# Altium PCB ECEN4730_AUA1_2021-10-18.PcbDoc
Units mm, origin at the board's own origin, x right, y up, seen from the top; angles counter-clockwise.
Board outline 68.58 x 53.34 mm, 2 copper layers (Top Layer, Bottom Layer), stack 1.569 mm thick; 40 components, 37 nets, 175 pads, 73 vias.
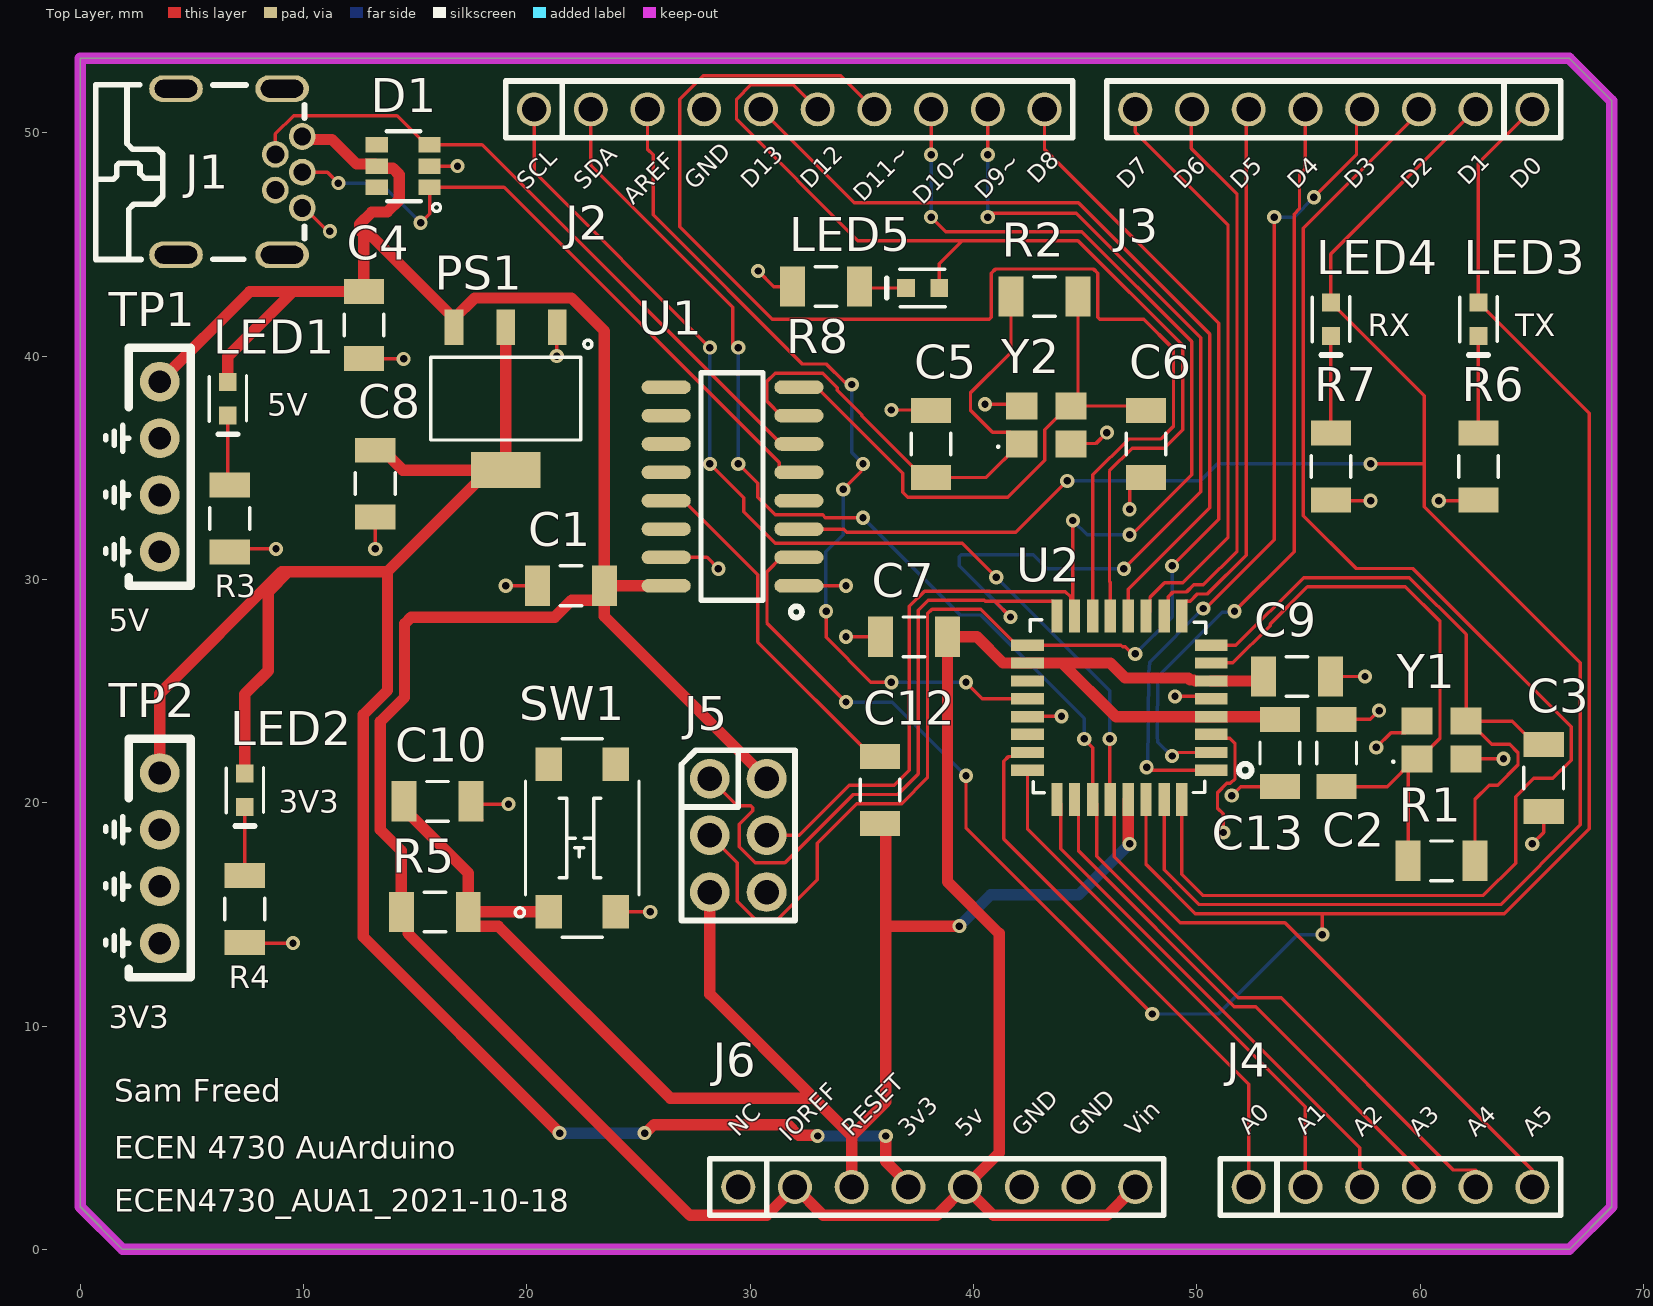
[diagram p0: Top Layer view]
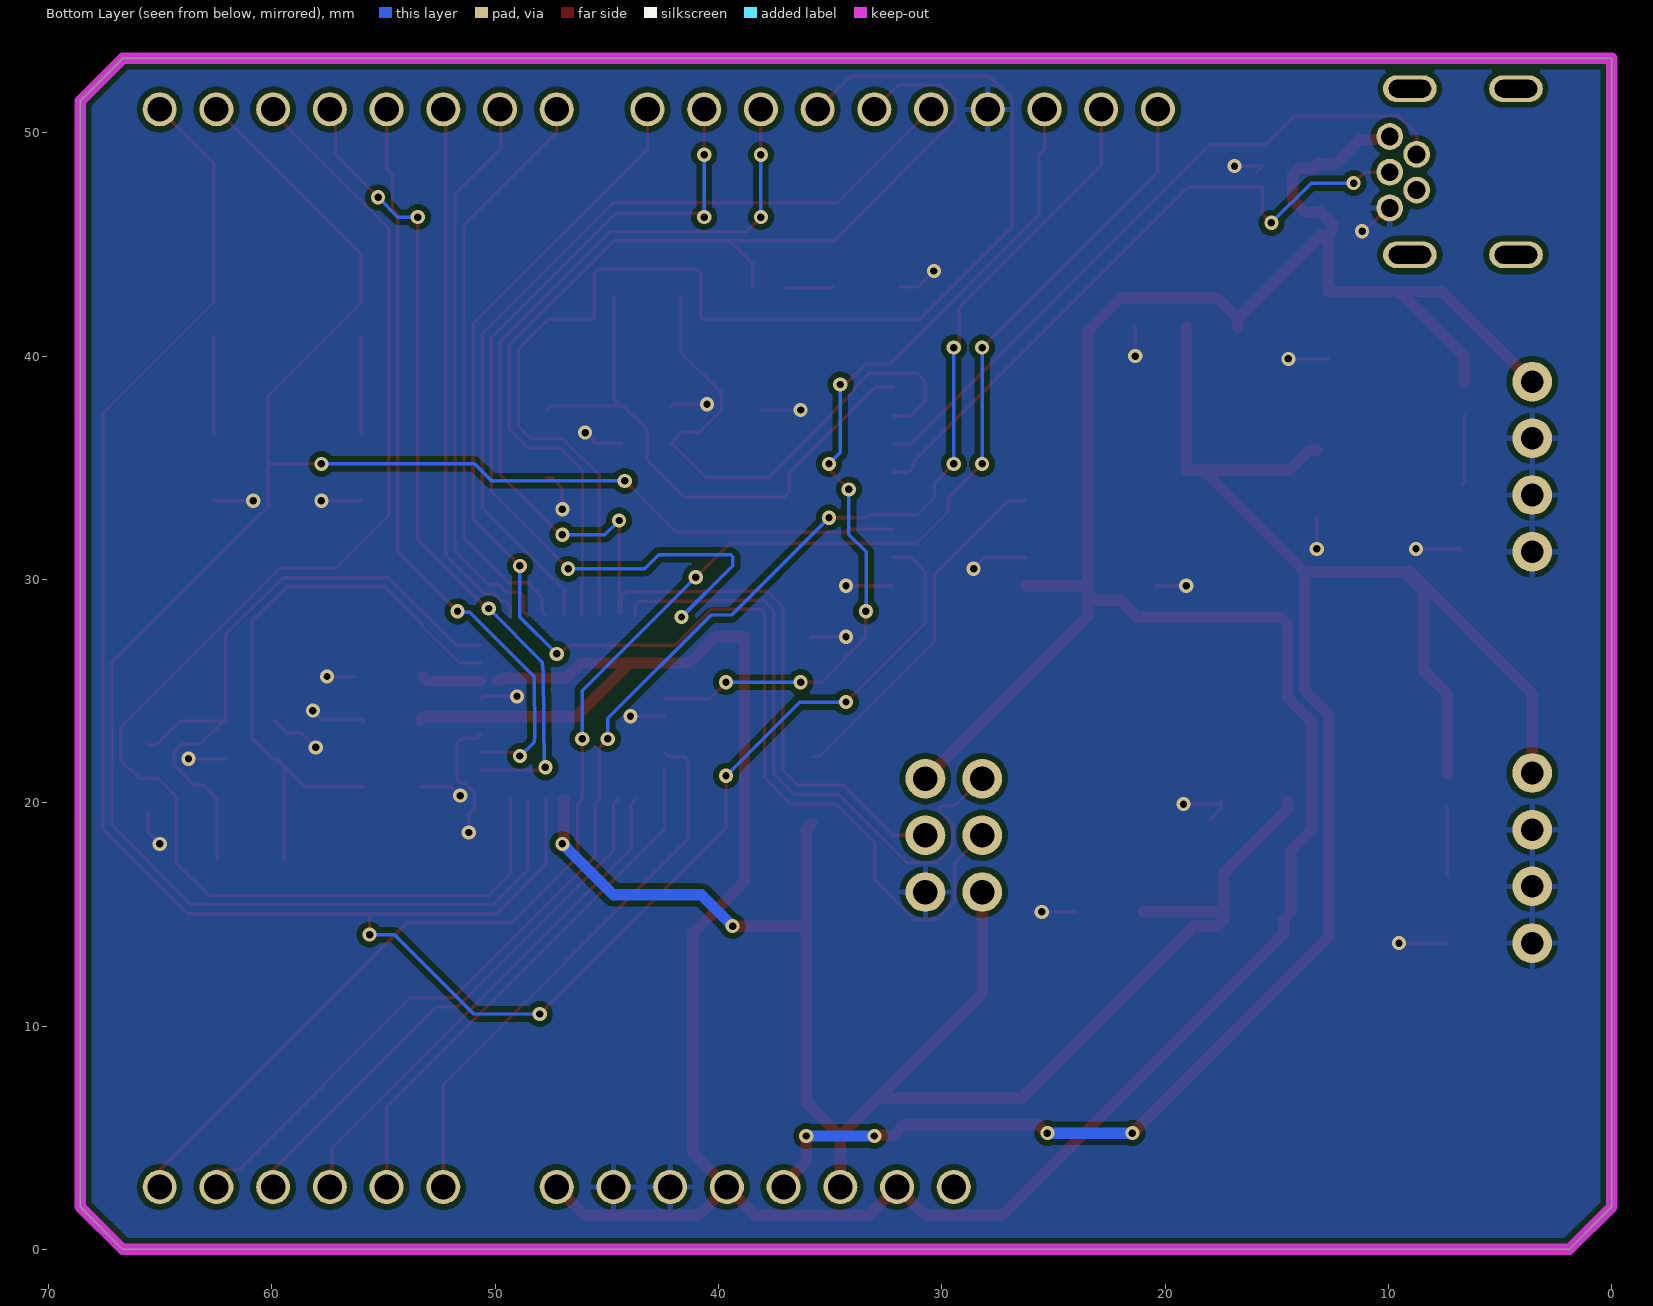
[diagram p1: Bottom Layer view, seen from below]
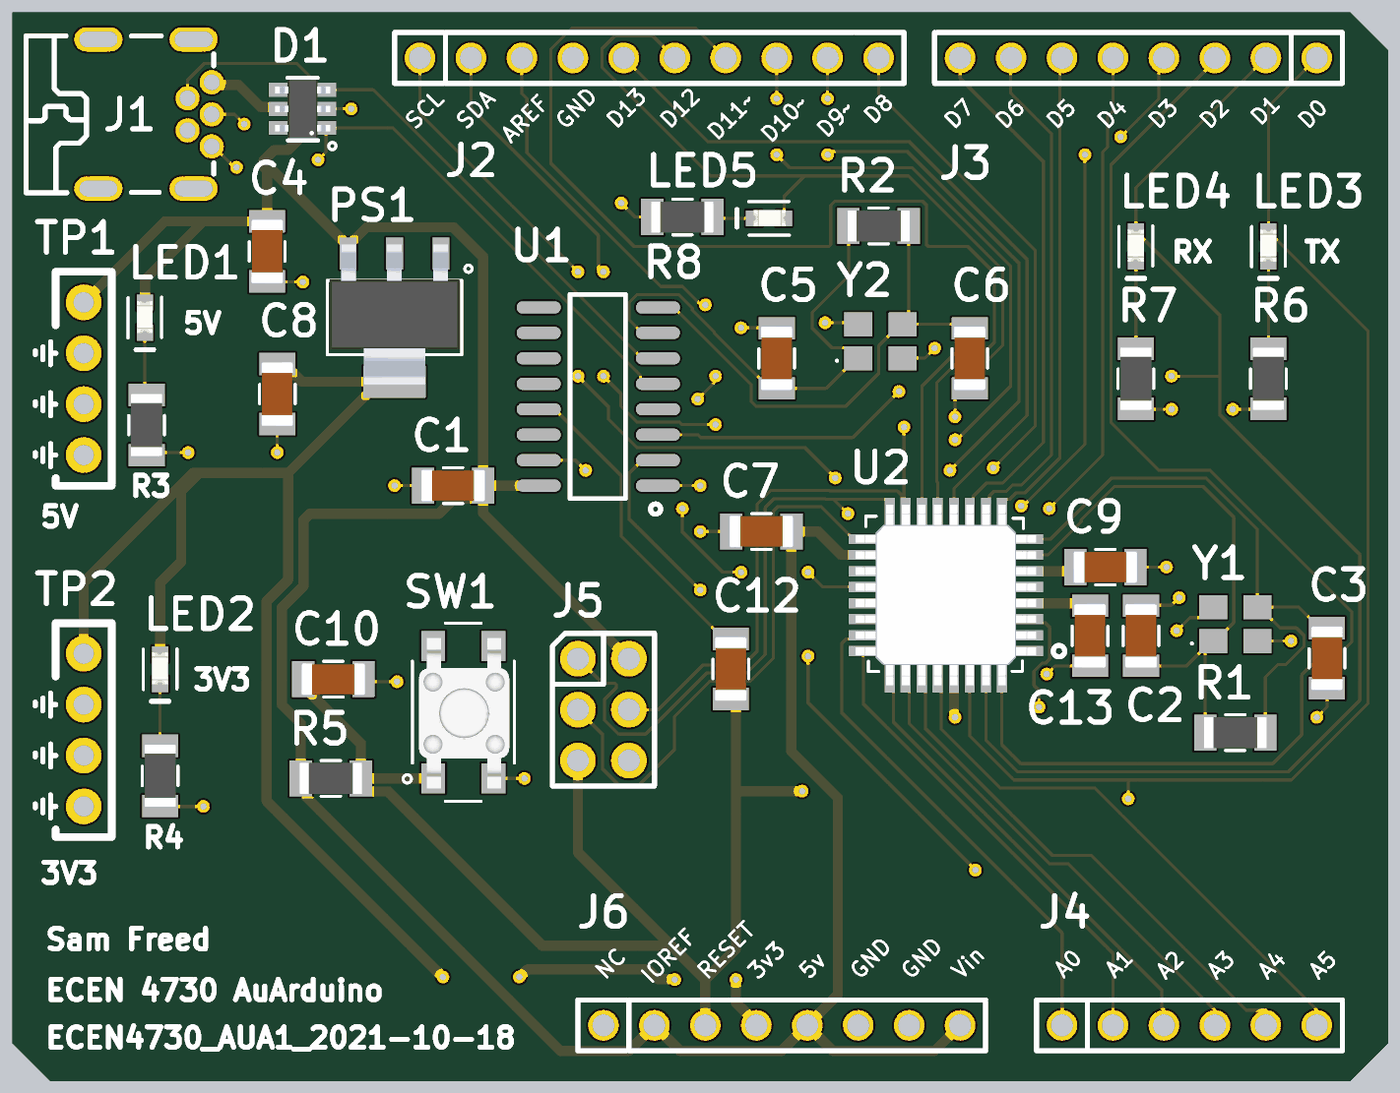
[diagram p2: 3D render of the assembled board from above, using the file's embedded part models]

## Layer stack, top to bottom
Top Solder: solder mask 0.0254, SM-001, Dk 4
Top Layer: signal copper 0.035
Dielectric 1: core 1.4986, Core-043, Dk 4.3
Bottom Layer: signal copper 0.035
Bottom Solder: solder mask 0.0254, SM-001, Dk 4

## Board outline
66.675,53.34 68.58,51.435 68.58,1.905 66.675,0 1.905,0 0,1.905 0,53.34

## Design rules (kind name [scope] priority, off if disabled: settings)
BoardOutlineClearance [All] p1: gap=0.254 ignorepadtopadclearanceinfootprint=FALSE except(0: Arc-SplitContinuation Track-SplitContinuation SMDPad-SplitContinuation THPad-SplitContinuation Via-SplitContinuation Fill-SplitContinuation Poly-SplitContinuation Region-SplitContinuation Text-SplitContinuation)
Clearance [All] p1: gap=0.254 ignorepadtopadclearanceinfootprint=FALSE except(0: Arc-Hole Track-Hole SMDPad-Hole THPad-Hole Via-Hole Fill-Hole Poly-Hole Region-Hole Text-Hole)
PlaneClearance [All] p1: clearance=0.254
PlaneConnect [All] p1: planeconnectstyle=Direct reliefexpansion=0.508 reliefentries=4 reliefconductorwidth=0.254 reliefairgap=0.254
PolygonConnect [All] p1: thpad.connectstyle=Relief thpad.reliefconductorwidth=0.254 thpad.reliefentries=4 thpad.polygonreliefangle="90 Angle" thpad.airgapwidth=0.254 smdpad.connectstyle=Direct smdpad.reliefconductorwidth=0.254 smdpad.reliefentries=4 smdpad.polygonreliefangle="90 Angle" smdpad.airgapwidth=0.254 via.connectstyle=Direct via.reliefconductorwidth=0.254 via.reliefentries=4 via.polygonreliefangle="90 Angle" via.airgapwidth=0.254
RoutingVias [All] p1: holewidth=0.33 width=0.635 viastyle="Through Hole" minholewidth=0.33 minwidth=0.635 maxholewidth=1.524 maxwidth=2.032
SolderMaskExpansion [All] p1: expansion=0.102 istentingtop=FALSE
UnRoutedNet [All] p1: checkbadconnections=TRUE
Width "Schematic Width Constraint_2" [InNet('RST')] p1: maxlimit=2.54 minlimit=0.254 preferedwidth=0.508 minimp=50.000000 maximp=50.000000 favimp=50.000000
Width "Schematic Width Constraint_1" [InNet('VCC')] p2: maxlimit=2.54 minlimit=0.254 preferedwidth=0.508 minimp=50.000000 maximp=50.000000 favimp=50.000000
Width "Schematic Width Constraint" [InNet('+5')] p3: maxlimit=2.54 minlimit=0.254 preferedwidth=0.508 minimp=50.000000 maximp=50.000000 favimp=50.000000
Width [All] p4: maxlimit=2.54 minlimit=0.152 preferedwidth=0.152 minimp=50.000000 maximp=50.000000 favimp=50.000000
27 further rules are at their usual default settings.

## Components (designator, comment, footprint, x,y, rotation, side; value= is the part's Value field where it differs from the comment)
C1 "22uF" 1206_Passive_Capacitor 21.971,29.718 r0 top
C2 "22pF" 1206_Passive_Capacitor 56.261,22.225 r270 top
C3 "22pF" 1206_Passive_Capacitor 65.532,21.107 r90 top
C4 "22uF" 1206_Passive_Capacitor 12.7,41.402 r90 top
C5 "22pF" 1206_Passive_Capacitor 38.1,36.068 r270 top
C6 "22pF" 1206_Passive_Capacitor 47.725,36.068 r90 top
C7 "22uF" 1206_Passive_Capacitor 37.338,27.432 r0 top
C8 "22uF" 1206_Passive_Capacitor 13.208,34.29 r90 top
C9 "22uF" 1206_Passive_Capacitor 54.483,25.654 r180 top
C10 "1uF" 1206_Passive_Capacitor 16.002,20.066 r0 top
C12 "22uF" 1206_Passive_Capacitor 35.814,20.574 r270 top
C13 "22uF" 1206_Passive_Capacitor 53.721,22.225 r90 top
D1 "SRV05-4-P-T7" TVS 14.478,48.514 r180 top value="TVS DIODE 5.5V 6TSOP"
J1 "USB Mini" USB_MINI_B 7.112,48.26 r270 top value="USB mini B"
J2 "PPTC101LFBN-RC" 10_PIN_ARDUINO_100MIL 20.32,51.054 r0 top locked value=Female
J3 "PPTC081LFBN-RC" 8_PIN_ARDUINO_100MIL 65.024,51.054 r180 top locked value=Female
J4 "PPTC061LFBN-RC" 6_PIN_ARDUINO_100mil 52.324,2.794 r0 top locked value=Female
J5 "NRPN032PAEN-RC" ICSP 28.194,21.082 r0 top
J6 "PPTC081LFBN-RC" 8_PIN_ARDUINO_100MIL 29.464,2.794 r0 top locked value=Female
LED1 "KT-0603R" LED_0603 6.604,38.1 r270 top value=Yellow
LED2 "KT-0603R" LED_0603 7.366,20.562 r270 top value=Yellow
LED3 "KT-0603R" LED_0603 62.611,41.656 r270 top value=Yellow
LED4 "KT-0603R" LED_0603 56.007,41.656 r270 top value=Yellow
LED5 "KT-0603R" LED_0603 37.719,43.053 r180 top value=Yellow
PS1 "AMS1117-3.3" LDO 19.05,38.1 r180 top value="IC REG LINEAR 3.3V 800MA SOT223"
R1 "10k" 1206_Passive_Resitor 60.96,17.399 r0 top value=10KOhm
R2 "10k" 1206_Passive_Resitor 43.18,42.672 r0 top value=10KOhm
R3 "1k" 1206_Passive_Resitor 6.693,32.738 r90 top value="1K Ohm"
R4 "1k" 1206_Passive_Resitor 7.366,15.24 r90 top value="1K Ohm"
R5 "1k" 1206_Passive_Resitor 15.875,15.113 r180 top value="1K Ohm"
R6 "1k" 1206_Passive_Resitor 62.611,35.052 r90 top value="1K Ohm"
R7 "1k" 1206_Passive_Resitor 56.007,35.052 r90 top value="1K Ohm"
R8 "1k" 1206_Passive_Resitor 33.402,43.118 r0 top value="1K Ohm"
SW1 "TL3305AF160QG" Switch_JLC 22.479,18.417 r90 top
TP1 "10x Probe TP" TP10x_Probe 3.556,35.052 r270 top
TP2 "10x Probe TP" TP10x_Probe 3.556,17.526 r270 top
U1 "CH340G" "USB to serial" 29.21,34.163 r90 top value="USB to Serial"
U2 "ATMEGA328P-ANR" ATMega328P 46.482,24.257 r0 top value="IC MCU 8BIT 32KB FLASH 32TQFP"
Y1 "X322516MLB4SI" "Crystal resonator" 60.96,22.86 r0 top value=16MHz
Y2 "X322512MSB4SI" "Crystal resonator" 43.264,36.968 r0 top value=12MHz

## Footprints (in the part's own frame and the unit in brackets; to place one, negate y for a bottom-side part, rotate by r counter-clockwise, add the part's x,y. Pads: shape width x height; smd on the part's side, far side on the other; paste and mask are expansions set on the pad)
6_PIN_ARDUINO_100mil [mil]
  round 60 hole 43.31: 1(0,0) 2(100,0) 3(200,0) 4(300,0) 5(400,0) 6(500,0)
  silkscreen extent -50,-50 550,50
8_PIN_ARDUINO_100MIL [mil]
  round 60 hole 43.31: 1(0,0) 2(100,0) 3(200,0) 4(300,0) 5(400,0) 6(500,0) 7(600,0) 8(700,0)
  silkscreen extent -50,-50 750,50
10_PIN_ARDUINO_100MIL [mil]
  round 60 hole 43.31: 1(0,0) 2(100,0) 3(200,0) 4(300,0) 5(400,0) 6(500,0) 7(600,0) 8(700,0) 9(800,0) 10(900,0)
  silkscreen extent -50,-50 950,50
1206_Passive_Capacitor [mil]
  rect 44x71 smd: 1(-59,0) 2(59,0)
  silkscreen extent -19,-35 19,35, body extent -63,-31 63,32, height 50
1206_Passive_Resitor [mil]
  rect 44x71 smd: 1(-59,0) 2(59,0)
  silkscreen extent -19,-35 19,35, body extent -61,-31 61,31, height 26
ATMega328P [mil]
  rect 58x20 smd mask+1: 1(163.93,-110) 2(163.93,-79) 3(163.93,-47) 4(163.93,-16) 5(163.93,16) 6(163.93,47) 7(163.93,79) 8(163.93,110) 17(-160.07,110) 18(-160.07,79) 19(-160.07,47) 20(-160.07,16) 21(-160.07,-16) 22(-160.07,-47) 23(-160.07,-79) 24(-160.07,-110)
  rect 20x58 smd mask+1: 9(111.93,162) 10(80.93,162) 11(48.93,162) 12(17.93,162) 13(-14.07,162) 14(-45.07,162) 15(-77.07,162) 16(-108.07,162) 25(-108.07,-162) 26(-77.07,-162) 27(-45.07,-162) 28(-14.07,-162) 29(17.93,-162) 30(48.93,-162) 31(80.93,-162) 32(111.93,-162)
  silkscreen extent -155,-150 235,155, body extent -175,-177 179,177, height 46
"Crystal resonator" [mil]
  rect 55.11x47.24 smd: 1(-43.3,-35.43) 2(43.31,-35.43) 3(43.32,31.5) 4(-43.3,31.5)
  silkscreen extent -87,-42 -83,-38, body extent -65,-47 65,47, height 31
ICSP [mil]
  round 70 hole 43.31: 1(0,0) 2(0,-100) 3(0,-200) 4(100,0) 5(100,-100) 6(100,-200)
  silkscreen extent -50,-250 150,50
LDO [mil]
  rect 33x63 smd: 1(-91,-126) 2(0,-126) 3(91,-126)
  rect 122x63 smd: 4(0,126)
  silkscreen extent -152,-103 132,73, body extent -128,-144 128,132, height 73
LED_0603 [mm]
  rect 0.8x0.8 smd: 1(-0.75,0) 2(0.75,0)
  silkscreen extent -1.02,-0.84 1.6,0.84, body extent -0.84,-0.41 0.76,0.39, height 0.55
Switch_JLC [mm]
  rect 1.5x1.2 smd: 1(-3.3,1.5) 2(3.3,1.5) 3(-3.3,-1.5) 4(3.3,-1.5)
  silkscreen extent -4.44,-2.54 4.45,3, body extent -3.8,-2.29 3.7,2.21, height 3.7
TP10x_Probe [mil] "Small Probs footprint"
  round 70 hole 40: 1(-150,0) 2(-50,0) 2(50,0) 2(150,0)
  silkscreen extent -210,-95 210,55
TVS [mm]
  rect 1x0.7 smd mask+0.025: 1(-1.162,0.95) 2(-1.162,0) 3(-1.162,-0.95) 4(1.2,-0.95) 5(1.2,0) 6(1.2,0.95)
  silkscreen extent -1.65,-1.55 0.76,2.03, body extent -1.37,-1.44 1.38,1.46, height 1.1
"USB to serial" [mil]
  oval 24x86.61 smd: 1(-175,-117) 2(-125,-117) 3(-75,-117) 4(-25,-117) 5(25,-117) 6(75,-117) 7(125,-117) 8(175,-117) 9(175,117) 10(125,117) 11(75,117) 12(25,117) 13(-25,117) 14(-75,117) 15(-125,117) 16(-175,117)
  silkscreen extent -231,-122 201,56
USB_MINI_B [mm]
  round 1.2 hole 0.8: 1(-1.58,2.826) 2(-0.78,1.622) 3(0.02,2.826) 4(0.82,1.622) 5(1.62,2.826)
  oval 1.2x2.4 hole 0.8 slot 1.9 at 90 deg: 6(-3.72,1.924) 7(3.72,1.924) 8(-3.72,-2.826) 9(3.72,-2.826)
  silkscreen extent -3.89,-6.42 3.93,2.93

## Part data
C1 C4 C7 C8 C9 C12 C13: library part C_22uF_1206, "22uF ±10% 25V X5R 1206 Multilayer Ceramic Capacitors MLCC - SMD/SMT RoHS", LCSC Part#=C12891, MFR Part #=CL31A226KAHNNNE, Datasheet=https://datasheet.lcsc.com/lcsc/1811031514_Samsung-Electro-Mechanics-CL31A226KAHNNNE_C12891.pdf, Type=Extended
C2 C3 C5 C6: library part C_22pF_1206, "22pF ±5% 1kV C0G 1206 Multilayer Ceramic Capacitors MLCC - SMD/SMT RoHS", LCSC Part#=C313096, MFR Part #=1206CG220J102NT, Datasheet=https://datasheet.lcsc.com/lcsc/1810311150_FH-Guangdong-Fenghua-Advanced-Tech-1206CG220J102NT_C313096.pdf, Type=Extended
C10: library part C_1uF_1206, "MULTILAYER CERAMIC CAPACITORS MLCC - SMD/SMT 1UF 50V 1206 ROHS", LCSC Part#=C1848, MFR Part #=CL31B105KBHNNNE, Digikey Link=https://www.digikey.com/product-detail/en/C1206C105M4RACTU/399-8150-1-ND/3471873/?itemSeq=304982366, Digikey Part=399-8150-1-ND, Type=Basic
D1: library part D_TVS_Diode, "TVS SOT-23-6 ROHS", LCSC Part#=C85364, Datasheet=https://datasheet.lcsc.com/szlcsc/ProTek-Devices-SRV05-4-P-T7_C85364.pdf, MFR Part #=SRV05-4-P-T7, Type=Basic
J1: library part J_USB_B_Mini, "Through Hole USB Connectors RoHS", LCSC Part#=C46398, MFR Part #=920-462A2021D10102, Datasheet=https://datasheet.lcsc.com/szlcsc/2103081233_Jing-Extension-of-the-Electronic-Co-920-462A2021D10102_C46398.pdf, Type=Extended
J2: library part JF_10_PIN_FEMALE_ARDUINO, "10 Position Header Connector 0.100\" (2.54mm) Through Hole Tin", LCSC Part#=C225507, Digikey Link=https://www.digikey.com/product-detail/en/PPTC101LFBN-RC/S7008-ND/810149/?itemSeq=304982352, Digikey Part=S7008-ND, Type=Extended
J3 J6: library part JF_8_PIN_FEMALE_ARDUINO, "8 Position Header Connector 0.100\" (2.54mm) Through Hole Tin", LCSC Part#=C27438, Digikey Link=https://www.digikey.com/product-detail/en/PPTC081LFBN-RC/S7006-ND/810147/?itemSeq=304982354, Digikey Part=S7006-ND, Type=Extended
J4: library part JF_6_PIN_FEMALE_ARDUINO, "6 Position Header Connector 0.100\" (2.54mm) Through Hole Tin", LCSC Part#=C40877, Digikey Link=https://www.digikey.com/product-detail/en/PPTC061LFBN-RC/S7004-ND/810145/?itemSeq=304982353, Digikey Part=S7004-ND, Type=Extended
J5: library part J_ICSP, "Connector Header Through Hole 6 position 0.079\" (2.00mm)", LCSC Part#=C124384, Digikey Link=https://www.digikey.com/product-detail/en/NRPN032PAEN-RC/S5801-03-ND/804955/?itemSeq=304982355, Digikey Part=S5801-03-ND, Type=Extended
LED1 LED2 LED3 LED4 LED5: library part LED_YELLOW_0603, "LIGHT EMITTING DIODES (LED) YELLOW 585.5~591.5NM 90~180MCD@20MA TOP VIEW 0603 ROHS", LCSC Part#=C72038, MFR Part #=19-213/Y2C-CQ2R2L/3T(CY), Datasheet=https://datasheet.lcsc.com/szlcsc/Everlight-Elec-19-217-BHC-ZL1M2RY-3T_C72041.pdf, Type=Basic
PS1: library part PS_AMS_LDO_3v3, "LOW DROPOUT REGULATORS(LDO) POSITIVE FIXED 1.3V @ 800MA 15V 3.3V 1A SOT-223 ROHS", LCSC Part#=C6186, MFR Part #=AMS1117-3.3, Type=Basic
R1 R2: library part R_10KOhm_1206, "10 kOhms ±5% 0.25W, 1/4W Chip Resistor 1206 (3216 Metric) Automotive AEC-Q200 Thick Film", LCSC Part#=C17902, Digikey Link=https://www.digikey.com/product-detail/en/RMCF1206JT300R/RMCF1206JT300RCT-ND/1942776/?itemSeq=304982374, Digikey Part=RMCF1206JT300RCT-ND, Type=Basic
R3 R4 R5 R6 R7 R8: library part R_1K_1206, "CHIP RESISTOR - SURFACE MOUNT 1KOHMS ±1% 1/4W 1206 ROHS", LCSC Part#=C4410, MFR Part #=1206W4F1001T5, Digikey Link=https://www.digikey.com/product-detail/en/RNCP1206FTD1K00/RNCP1206FTD1K00CT-ND/2240675/?itemSeq=304982373, Digikey Part=RNCP1206FTD1K00CT-ND, Type=Basic
SW1: library part SW_Push_Button_JLC, "Tactile Switch SPST-NO Top Actuated Surface Mount", LCSC Part#=C174049, MFR Part #=C174049, Type=Extended
TP1 TP2: library part TP_10x_Probe, "Test Point 300 mil centers"
U1: library part U_USBtoSerial, "Transceiver USB 2.0 2Mbps SOP-16_150mil USB ICs RoHS", LCSC Part#=C14267, Datasheet=https://datasheet.lcsc.com/lcsc/2008191806_WCH-Jiangsu-Qin-Heng-CH340G_C14267.pdf, MFR Part #=CH340G, Type=Basic
U2: library part U_ATMega328P, "AVR AVR® ATmega Microcontroller IC 8-Bit 20MHz 32KB (16K x 16) FLASH 32-TQFP (7x7)", LCSC Part#=C14877, MFR Part #=ATMEGA328P-AU, Digikey Link=https://www.digikey.com/product-detail/en/ATMEGA328P-ANR/ATMEGA328P-ANRCT-ND/2774230/?itemSeq=304982365, Type=Basic
Y1: library part X_16Mhz_Res, "±10ppm 16000000Hz -40℃~85℃ 贴片无源晶振 60Ω 9pF SMD3225-4P Crystals ROHS", LCSC Part#=C13738, MFR Part #=X322516MLB4SI, Type=Basic
Y2: library part X_12MHz_Res, "SMD Crystal Resonators 12MHz ±10ppm SMD-3225_4P RoHS", LCSC Part#=C9002, Datasheet=https://datasheet.lcsc.com/szlcsc/Yangxing-Tech-X322512MSB4SI_C9002.pdf, MFR Part #=X322512MSB4SI, Type=Basic

## Via types
v1: diameter 0.635, hole 0.33, Top Layer to Bottom Layer, 73 vias

## Nets (pads, with @x,y where several pads share a name; then routed paths per layer and width w, separated by ;. In a path a pad name is that pad's centre, name@x,y a point inside that pad or via, vN(x,y) a via of type N, cw(c..) or ccw(c..) an arc to the next point about the centre after c; other vN are vias at no path point)
12X1: C5.2 R2.1 U1.7 Y2.1 | length 25.6
  Top Layer w0.152: U1.7 31.387,37.338 30.752,37.973 30.752,38.871 31.124,39.243 33.24,39.243 33.896,38.587 33.896,38.467 34.989,37.375 34.989,37.338 37.757,34.569 40.565,34.569 42.064,36.068 Y2.1 41.64,36.592 40.851,36.592 39.865,37.578 39.865,38.363 41.681,40.179 R2.1
12X2: C6.2 R2.2 U1.8 Y2.3 | length 25.7
  Top Layer w0.152: U1.8 32.977,38.608 36.83,34.755 36.83,33.912 37.062,33.68 41.543,33.68 43.194,35.331 43.194,36.698 44.264,37.768 Y2.3 ; R2.2 44.679,38.082 Y2.3 ; C6.2 47.523,37.768 Y2.3
16X1: C2.2 R1.1 U2.7 Y1.1 | length 28.2
  Top Layer w0.152: U2.7 51.611,26.264 53.283,27.936 53.283,28.007 54.956,29.68 59.344,29.68 60.89,28.134 60.89,22.89 59.96,21.96 Y1.1 ; C2.2@55.88,20.726 58.526,20.726 59.76,21.96 Y1.1 ; R1.1 59.461,21.561 Y1.1
16X2: C3.2 R1.2 U2.8 Y1.3 | length 30.2
  Top Layer w0.152: U2.8 51.752,27.051 54.787,30.086 59.513,30.086 62.06,27.539 Y1.3 Y1.3@62.16,23.66 ; R1.2 62.459,20.162 63.09,20.793 63.476,20.793 64.386,21.703 64.386,22.239 64.006,22.619 63.202,22.619 Y1.3@62.16,23.66 ; C3.2 65.189,22.606 64.135,23.66 Y1.3@62.16,23.66
+5: C1.2 C4.2 C7.2 C9.2 C13.2 D1.5 J1.1 J5.4 J6.2 J6.5 J6.8 LED1.1 PS1.3 R5.2 TP1.1 U1.16 U2.4 U2.6 U2.18 | length 183.1
  Top Layer w0.508: TP1.1 7.595,42.901 9.525,42.901 ; LED1.1 6.604,39.98 9.525,42.901 ; J1.1 10.07,49.708 11.274,49.708 12.375,48.606 13.186,48.606 D1.5 ; D1.5@13.278,48.422 13.988,48.422 14.286,48.124 14.286,47.004 13.74,46.457 13.055,46.457 12.509,45.911 12.509,45.641 12.7,45.45 ; PS1.3 PS1.3@16.739,41.681 ; U1.16 C1.2 ; J5.4 23.47,28.346 C1.2@23.47,29.375 ; J6.8 45.974,1.524 40.894,1.524 J6.5 ; U2.6@49.928,25.451 49.877,25.502 49.699,25.502 49.61,25.59 46.798,25.59 46.125,26.264 43.967,26.264 ; U2.6 53.035,25.451 C9.2@53.238,25.654 ; C13.2@53.34,23.724 53.213,23.851 U2.4 46.38,23.851 43.967,26.264 ; 9.525,42.901 C4.2 12.7,45.45 ; 12.7,45.45 12.97,45.45 PS1.3@16.739,41.681 ; PS1.3@16.739,41.681 17.666,42.608 21.991,42.608 23.47,41.13 C1.2 ; C1.2@23.47,29.375 C1.2 ; C1.2@23.47,29.375 23.165,29.07 22.004,29.07 21.242,28.308 14.814,28.308 14.516,28.011 14.516,24.72 13.437,23.64 13.437,18.787 14.376,17.847 R5.2 14.681,14.808 14.681,14.153 27.31,1.524 30.734,1.524 J6.2 33.274,1.524 38.354,1.524 J6.5 ; J6.5 41.148,4.318 41.148,14.152 38.837,16.463 C7.2 40.157,27.432 41.326,26.264 U2.18 43.967,26.264
D+: D1.1 J1.3 U1.5 | length 30
  Top Layer w0.152: J1.3 11.069,48.24 v1(11.557,47.752) ; v1(15.24,45.974) 15.64,46.374 D1.1 18.975,47.564 31.299,35.24 31.299,35.009 31.51,34.798 U1.5
  Bottom Layer w0.152: v1(11.557,47.752) 13.462,47.752 v1(15.24,45.974)
D-: D1.3 J1.2 U1.6 | length 30.8
  Top Layer w0.152: J1.2 8.734,49.952 9.553,50.77 14.184,50.77 15.49,49.464 D1.3 17.991,49.464 31.387,36.068 U1.6
DTR: C12.1 U1.13 | length 16.1
  Top Layer w0.152: U1.13 27.033,33.528 30.345,30.216 30.345,27.199 35.471,22.073 C12.1
GND: C1.1 C2.1 C3.1 C4.1 C5.1 C6.1 C7.1 C8.1 C9.1 C10.2 C13.1 D1.2 J1.5 J2.4 J5.6 J6.6 J6.7 PS1.1 R3.1 R4.1 R6.1 R7.1 R8.1 SW1.3 TP1.2 TP2.2 U1.1 U1.15 U2.3 U2.5 U2.21 Y1.2 Y1.4 Y2.2 Y2.4 | length 56.9
  Top Layer w0.152: R3.1 6.822,31.369 v1(8.763,31.369) ; R4.1 7.391,13.716 v1(9.525,13.716) ; J1.5 10.033,46.64 11.08,45.593 v1(11.176,45.593) ; C4.1 12.725,39.878 v1(14.478,39.878) ; v1(13.208,31.369) C8.1 ; D1.2@15.91,48.244 D1.2 v1(16.891,48.514) ; C10.2@17.983,19.241 17.501,19.723 C10.2 17.628,19.939 v1(19.177,19.939) ; v1(19.05,29.718) C1.1 ; v1(21.336,40.005) 21.336,41.275 PS1.1 ; SW1.3 23.983,15.113 v1(25.527,15.113) ; U1.15 28.067,30.988 v1(28.575,30.48) ; v1(30.353,43.815) 31.05,43.118 R8.1 ; U1.1 v1(34.29,29.718) ; v1(34.29,27.432) C7.1 ; v1(36.322,37.592) 38.075,37.592 C5.1 ; v1(40.513,37.846) 42.086,37.846 Y2.4 ; U2.21 42.442,23.876 v1(43.942,23.876) ; Y2.2 44.385,36.089 45.487,36.089 v1(45.974,36.576) ; v1(46.99,33.147) 46.99,34.087 47.473,34.569 C6.1 ; v1(49.022,24.765) 50.544,24.765 U2.5 ; U2.3 50.824,22.885 51.468,22.885 51.713,22.641 51.713,21.072 51.506,20.866 51.336,20.866 50.927,20.457 50.927,19.755 51.181,19.501 v1(51.181,18.669) ; v1(51.562,20.32) 51.968,20.726 C13.1@53.34,20.726 ; C2.1@55.88,23.597 C2.1@55.905,23.622 ; C2.1@55.905,23.749 57.775,23.749 58.156,24.13 v1(58.166,24.13) ; R7.1 56.032,33.528 v1(57.785,33.528) ; C9.1@56.236,25.654 v1(57.531,25.654) ; v1(58.039,22.479) 58.696,23.136 59.336,23.136 Y1.4 ; v1(60.833,33.528) 62.586,33.528 R6.1 ; Y1.2 62.071,21.971 v1(63.738,21.971) ; v1(65.024,18.161) 65.532,18.669 C3.1
MISO: J2.9 J5.1 U2.16 | length 69.6
  Top Layer w0.152: J5.1 29.413,19.863 30.026,19.863 30.115,19.774 30.115,19.647 29.515,19.047 29.515,18.037 30.229,17.323 31.559,17.323 34.607,20.371 36.614,20.371 37.532,21.288 37.532,28.629 37.973,29.07 40.489,29.07 40.527,29.032 40.945,29.032 ; v1(40.64,46.228) 40.64,46.305 40.729,46.395 44.608,46.395 50.176,40.826 50.176,33.92 v1(46.736,30.48) ; v1(40.64,49.022) J2.9 ; v1(41.656,28.321) 40.945,29.032 ; U2.16 43.737,28.854 43.559,29.032 40.945,29.032
  Bottom Layer w0.152: v1(40.64,46.228) v1(40.64,49.022) ; v1(41.656,28.321) 39.37,30.607 39.37,31.026 39.459,31.115 42.67,31.115 43.305,30.48 v1(46.736,30.48)
MOSI: J2.8 J5.5 U2.15 | length 59
  Top Layer w0.152: J5.5 32.204,18.542 34.439,20.777 36.446,20.777 37.125,21.456 37.125,28.798 37.804,29.477 40.727,29.477 40.753,29.451 44.115,29.451 44.347,29.22 44.347,28.55 44.436,28.461 44.45,28.475 v1(44.45,32.639) ; v1(38.1,46.228) 38.748,45.58 44.847,45.58 49.77,40.658 49.77,34.687 47.087,32.004 v1(46.99,32.004) ; v1(38.1,49.022) J2.8
  Bottom Layer w0.152: v1(38.1,46.228) v1(38.1,49.022) ; v1(44.45,32.639) 45.085,32.004 v1(46.99,32.004)
NetJ2_1: J2.1 J4.6 U2.28 | length 73.7
  Top Layer w0.152: J2.1 20.32,48.26 v1(28.194,40.386) ; v1(28.194,35.179) 29.705,33.668 29.705,33.042 31.124,31.623 39.497,31.623 v1(41.021,30.099) ; v1(46.101,22.86) 46.101,20.166 U2.28 46.302,19.964 46.302,17.579 49.251,14.63 53.95,14.63 65.024,3.556
  Bottom Layer w0.152: v1(28.194,35.179) v1(28.194,40.386) ; v1(41.021,30.099) 46.101,25.019 v1(46.101,22.86)
NetJ2_2: J2.2 J4.5 U2.27 | length 68.5
  Top Layer w0.152: J2.2 22.86,48.547 29.21,42.197 29.21,40.475 29.375,40.475 v1(29.464,40.386) ; v1(29.464,35.179) 30.34,34.303 30.34,33.677 31.124,32.893 33.24,32.893 33.367,32.766 v1(35.052,32.766) ; v1(44.958,22.86) 44.958,22.846 45.337,22.467 U2.27 45.515,19.964 45.515,17.607 51.851,11.271 53.774,11.271 61.489,3.556 62.484,3.556
  Bottom Layer w0.152: v1(29.464,35.179) v1(29.464,40.386) ; v1(35.052,32.766) 39.409,28.409 40.325,28.409 44.958,23.776 v1(44.958,22.86)
NetJ2_3: J2.3 U2.20 | length 39.3
  Top Layer w0.152: J2.3 25.4,49.276 25.651,49.025 25.651,46.331 32.333,39.649 33.408,39.649 34.23,38.827 34.452,38.827 v1(34.544,38.735) ; v1(33.401,28.575) 33.401,27.405 35.406,25.4 v1(36.322,25.4) ; v1(34.163,34.036) 34.96,34.833 34.96,35.087 v1(35.052,35.179) ; v1(39.662,25.4) 40.399,24.663 U2.20
  Bottom Layer w0.152: v1(33.401,28.575) 33.388,28.588 33.388,31.234 34.163,32.009 v1(34.163,34.036) ; v1(34.544,38.735) 34.544,35.687 v1(35.052,35.179) ; v1(36.322,25.4) v1(39.662,25.4)
NetJ2_5: J2.5 U2.12 | length 38.4
  Top Layer w0.152: J2.5 34.658,46.876 44.701,46.876 50.582,40.995 50.582,33.214 46.937,29.569 U2.12
NetJ2_7: J2.7 U2.14 | length 58.3
  Top Layer w0.152: J2.7 34.061,52.553 27.894,52.553 26.848,51.506 26.848,45.796 30.988,41.656 40.703,41.656 40.792,41.745 40.792,43.71 40.986,43.904 45.374,43.904 45.568,43.71 45.568,41.745 45.657,41.656 47.622,41.656 48.957,40.321 48.957,36.871 48.376,36.29 46.943,36.29 45.337,34.684 U2.14
NetJ3_3: J3.3 U2.32 | length 63.2
  Top Layer w0.152: U2.32 49.325,16.794 50.27,15.85 62.837,15.85 64.275,17.288 64.275,20.279 65.09,21.095 65.948,21.095 66.764,21.91 66.764,23.41 59.681,30.493 57.14,30.493 54.775,32.858 54.775,45.731 59.944,50.9 J3.3
NetJ3_4: J3.4 U2.1 | length 37
  Top Layer w0.152: v1(47.752,21.59) 47.883,21.59 48.022,21.45 50.633,21.45 U2.1 ; v1(50.292,28.702) 50.392,28.702 53.467,31.777 v1(53.467,46.228) ; v1(55.245,47.117) 57.15,49.022 57.15,50.8 J3.4
  Bottom Layer w0.152: v1(47.752,21.59) 47.796,21.634 47.841,25.81 47.886,26.296 v1(50.292,28.702) ; v1(53.467,46.228) 54.356,46.228 v1(55.245,47.117)
NetJ3_5: J3.5 U2.2 | length 34.1
  Top Layer w0.152: v1(48.895,22.098) 49.022,22.098 49.174,22.25 U2.2 ; v1(51.689,28.575) 54.356,31.242 54.356,46.356 54.597,46.597 54.597,48.121 54.864,48.388 J3.5
  Bottom Layer w0.152: v1(48.895,22.098) 48.868,22.098 48.292,22.674 48.247,22.719 48.229,22.979 cw(c48.875,23.025) 48.227,23.03 48.247,25.641 48.292,25.686 51.143,28.537 51.651,28.537 v1(51.689,28.575)
NetJ3_6: J3.6 U2.9 | length 24.3
  Top Layer w0.152: U2.9 49.325,28.854 49.503,29.032 49.706,29.032 50.024,29.35 50.465,29.35 52.208,31.093 52.208,50.938 J3.6
NetJ3_7: J3.7 U2.10 | length 25.5
  Top Layer w0.152: U2.10 48.715,28.55 48.715,29.22 48.934,29.439 49.538,29.439 49.855,29.756 50.297,29.756 51.802,31.261 51.802,47.258 49.759,49.301 49.759,51.029 J3.7
NetJ3_8: J3.8 U2.11 | length 26.4
  Top Layer w0.152: J3.8 47.244,50.038 51.395,45.887 51.395,31.871 49.37,29.845 48.553,29.845 47.903,29.194 47.903,28.55 U2.11
NetJ4_1: J4.1 U2.23 | length 24.1
  Top Layer w0.152: U2.23 42.238,22.073 41.568,22.073 41.349,21.854 41.349,18.378 52.324,7.403 52.324,3.556
NetJ4_2: J4.2 U2.24 | length 23.1
  Top Layer w0.152: U2.24 42.416,18.83 54.864,6.382 54.864,3.556
NetJ4_3: J4.3 U2.25 | length 22.2
  Top Layer w0.152: U2.25 43.915,19.964 43.915,17.933 57.301,4.547 57.301,3.659 57.404,3.556
NetJ4_4: J4.4 U2.26 | length 23.5
  Top Layer w0.152: U2.26 44.702,19.964 44.702,17.845 51.683,10.864 52.636,10.864 59.944,3.556
NetLED1_2: LED1.2 R3.2 | length 3.1
  Top Layer w0.152: LED1.2 6.604,34.326 R3.2
NetLED2_2: LED2.2 R4.2 | length 3.1
  Top Layer w0.152: R4.2 LED2.2
NetLED3_2: LED3.2 R6.2 | length 4.4
  Top Layer w0.152: R6.2 LED3.2
NetLED4_2: LED4.2 R7.2 | length 4.4
  Top Layer w0.152: R7.2 LED4.2
NetLED5_2: LED5.2 R8.2 | length 2.1
  Top Layer w0.152: R8.2 34.965,43.053 LED5.2
P13: J2.6 LED5.1 U2.13 | length 46.3
  Top Layer w0.152: J2.6 31.928,52.146 30.028,52.146 29.388,51.506 29.388,50.602 34.815,45.174 39.497,45.174 ; LED5.1 38.469,44.146 39.497,45.174 ; U2.13 46.125,29.872 46.088,29.908 46.088,34.86 47.112,35.884 48.544,35.884 49.363,36.703 49.363,40.49 44.679,45.174 39.497,45.174
RST: C10.1 C12.2 J5.3 J6.3 R5.1 SW1.1 U2.29 | length 73.9
  Top Layer w0.508: C10.1 14.503,19.723 17.374,16.853 R5.1 ; SW1.1 17.378,15.117 R5.1 ; J5.3 28.194,11.43 32.857,6.767 ; J6.3 34.544,5.08 ; C12.2 36.068,18.821 36.068,14.478 ; v1(39.37,14.478) 36.068,14.478 ; U2.29 46.937,18.214 v1(46.99,18.161) ; R5.1 17.374,14.77 17.678,14.465 18.727,14.465 26.425,6.767 32.857,6.767 ; 32.857,6.767 34.544,5.08 ; 34.544,5.08 36.068,6.604 36.068,14.478
  Bottom Layer w0.508: v1(39.37,14.478) 40.767,15.875 44.704,15.875 v1(46.99,18.161)
RXD: J3.2 LED4.1 U1.3 U2.31 | length 92.6
  Top Layer w0.152: U1.3 34.184,32.258 34.324,32.118 41.897,32.118 v1(44.196,34.417) ; U2.31 48.538,17.007 50.101,15.443 63.603,15.443 67.17,19.01 67.17,26.275 60.185,33.26 60.185,35.179 ; v1(57.785,35.179) 60.185,35.179 ; J3.2 56.007,44.577 LED4.1 60.185,38.228 60.185,35.179
  Bottom Layer w0.152: v1(44.196,34.417) 50.165,34.417 50.927,35.179 v1(57.785,35.179)
SCK: J2.10 J5.2 U2.17 | length 62.6
  Top Layer w0.152: J5.2 29.413,17.323 29.413,15.599 30.229,14.783 31.239,14.783 33.007,16.551 33.007,18.196 34.776,19.964 36.783,19.964 37.938,21.12 37.938,28.461 38.141,28.664 40.321,28.664 41.934,27.051 U2.17 42.421,27.056 46.604,27.056 46.677,26.983 46.801,26.983 47.113,26.67 v1(47.244,26.67) ; J2.10 43.18,49.276 50.989,41.467 50.989,32.701 v1(48.895,30.607)
  Bottom Layer w0.152: v1(47.244,26.67) 48.895,28.321 v1(48.895,30.607)
TXD: J3.1 LED3.1 U1.2 U2.30 | length 100.4
  Top Layer w0.152: U1.2 31.387,30.988 30.752,30.353 30.752,28.049 v1(34.29,24.511) ; v1(39.662,21.209) 39.662,18.885 v1(48.006,10.541) ; U2.30 47.725,17.245 49.933,15.037 55.626,15.037 ; v1(55.626,14.097) 55.626,15.037 ; J3.1 62.611,48.641 LED3.1 67.577,37.44 67.577,18.842 63.772,15.037 55.626,15.037
  Bottom Layer w0.152: v1(34.29,24.511) 36.36,24.511 v1(39.662,21.209) ; v1(48.006,10.541) 50.954,10.541 54.51,14.097 v1(55.626,14.097)
VCC: C8.2 J6.4 LED2.1 PS1.2 PS1.4 TP2.1 | length 91.6
  Top Layer w0.508: TP2.1 3.556,24.892 9.017,30.353 9.315,30.353 ; LED2.1 7.366,24.868 8.413,25.915 8.413,29.452 9.315,30.353 ; C8.2 13.551,35.789 14.44,34.9 PS1.4@18.301,34.9 ; PS1.2 PS1.4 PS1.4@18.301,34.9 ; v1@21.336,5.334 12.675,13.995 12.675,23.956 13.754,25.035 13.754,30.353 ; v1(25.273,5.207) 25.307,5.207 25.688,5.588 31.686,5.588 32.17,5.104 32.996,5.104 v1(33.02,5.08) ; v1(36.068,5.08) 36.068,3.933 37.084,2.917 J6.4 ; 9.315,30.353 13.754,30.353 ; 13.754,30.353 PS1.4@18.301,34.9
  Bottom Layer w0.508: v1(21.463,5.207) v1(25.273,5.207) ; v1(33.02,5.08) v1(36.068,5.08)
pads on no net: D1.4 D1.6 J1.4 J1.6 J1.7 J1.8 J1.9 J6.1 SW1.2 SW1.4 U1.4 U1.9 U1.10 U1.11 U1.12 U1.14 U2.19 U2.22

## Polygon pours and split planes (outlines as drawn)
GND on Bottom Layer "GND_L02_P000" (solid, pour order 0): 0,53.34 68.58,53.34 68.58,0 0,0

## Keep-outs
Keep-Out Layer:
  the board outline again, w0.508

## Other copper
Bottom Layer:
  pour cut-out: 41.64,27.749 42.141,28.25 42.296,28.25 42.345,28.299 45.764,24.88 45.764,23.298 45.593,23.127 45.466,23.127 45.466,23.16 45.269,23.357 45.269,23.941 41.588,27.622

## Silkscreen, mask and mechanical layers (free items; w line width, h text height)
Top Overlay:
  text "D1" at 62.13,47.603 h0.76 r45
  text "D7" at 46.863,47.424 h0.76 r45
  text "D6" at 49.407,47.424 h0.76 r45
  text "D5" at 51.952,47.424 h0.76 r45
  text "D4" at 54.496,47.424 h0.76 r45
  text "D3" at 57.041,47.424 h0.76 r45
  text "D2" at 59.585,47.424 h0.76 r45
  text "D0" at 64.495,47.424 h0.76 r45
  text "RX" at 57.658,40.894 h1.02
  text "TX" at 64.262,40.894 h1.02
  text "5V" at 8.382,37.338 h1.02
  text "5V" at 1.27,27.686 h1.02
  text "3V3" at 8.89,19.558 h1.02
  text "3V3" at 1.27,9.906 h1.02
  text "Sam Freed" at 1.524,6.604 h1.02
  text "ECEN 4730 AuArduino" at 1.524,4.064 h1.02
  text "ECEN4730_AUA1_2021-10-18" at 1.524,1.693 h1.02

## Text inside footprints (layer, text, board x,y; h text height)
J2: Top Overlay "D8" at 42.856,47.678 h0.76 r45; Top Overlay "D9~" at 40.513,46.99 h0.76 r45; Top Overlay "D10~" at 37.719,46.736 h0.76 r45; Top Overlay "D11~" at 35.052,46.863 h0.76 r45; Top Overlay "D12" at 32.696,47.453 h0.76 r45; Top Overlay "D13" at 30.029,47.453 h0.76 r45; Top Overlay "GND" at 27.489,47.408 h0.76 r45; Top Overlay "AREF" at 24.765,46.736 h0.76 r45; Top Overlay "SDA" at 22.536,47.408 h0.76 r45; Top Overlay "SCL" at 19.996,47.408 h0.76 r45
J4: Top Overlay "A1" at 54.864,5.08 h0.76 r45; Top Overlay "A0" at 52.324,5.08 h0.76 r45; Top Overlay "A2" at 57.404,5.006 h0.76 r45; Top Overlay "A3" at 59.944,5.006 h0.76 r45; Top Overlay "A4" at 62.484,5.006 h0.76 r45; Top Overlay "A5" at 65.024,5.006 h0.76 r45
J6: Top Overlay "NC" at 29.464,5.006 h0.76 r45; Top Overlay "IOREF" at 31.75,4.785 h0.76 r45; Top Overlay "RESET" at 34.544,5.006 h0.76 r45; Top Overlay "3v3" at 37.084,5.006 h0.76 r45; Top Overlay "5v" at 39.624,5.006 h0.76 r45; Top Overlay "GND" at 42.164,5.006 h0.76 r45; Top Overlay "GND" at 44.704,5.006 h0.76 r45; Top Overlay "Vin" at 47.244,5.006 h0.76 r45